# Altium PCB 400926.PcbDoc (part 7 of 7)
Units mm, origin at the board's own origin, x right, y up, seen from the top; angles counter-clockwise.
Board outline 148.5 x 63.5 mm, 4 copper layers (Top Layer, Mid-Layer 1, Mid-Layer 2, Bottom Layer), stack 1.514 mm thick; 311 components, 281 nets, 1495 pads, 2232 vias.
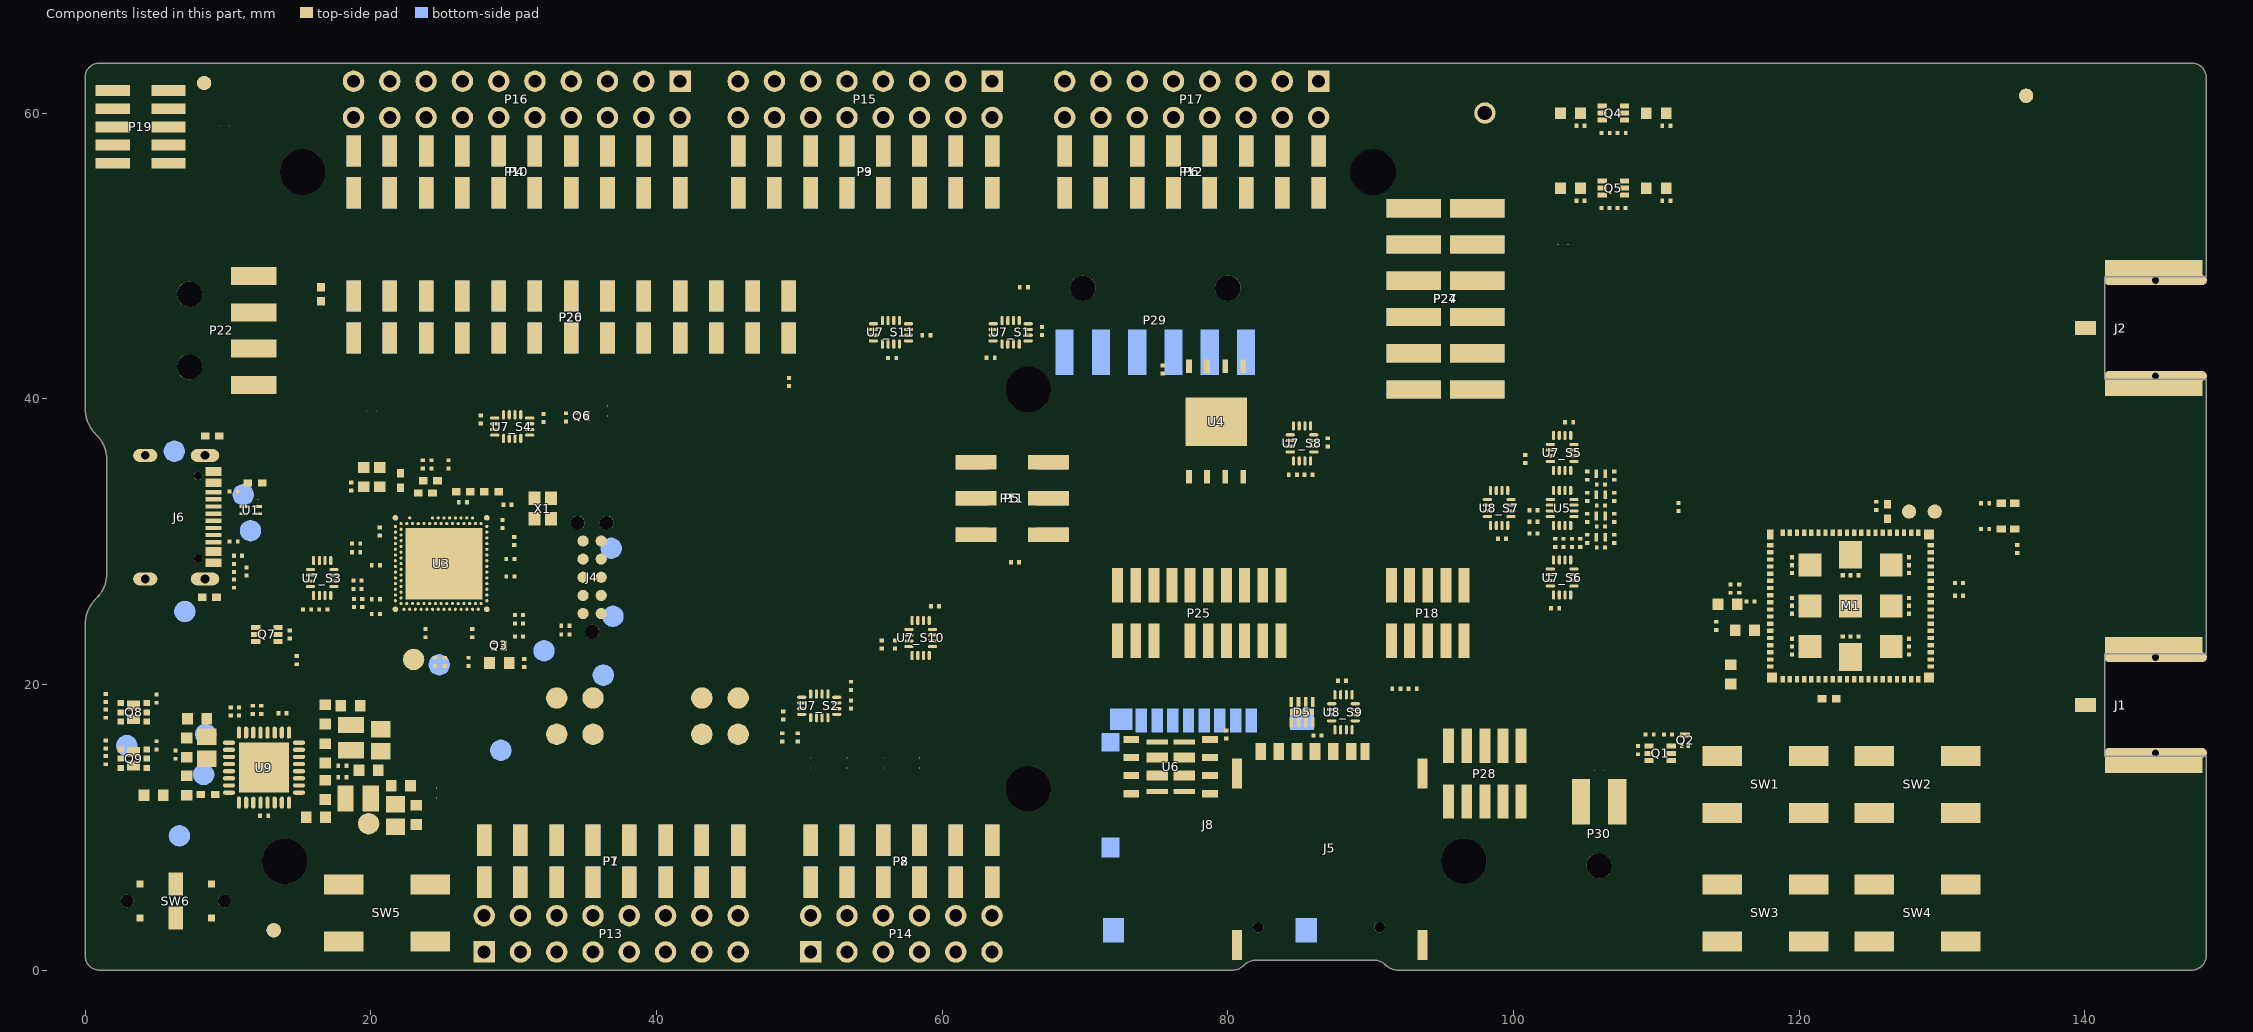
[diagram p8: the components of this part, seen from the top]

## Other copper
Top Layer:
  region net VIN:5V: 39.626,46.224 38.606,46.224 38.606,45.224 39.626,45.224
  region net VDD_nRF: 42.166,46.224 41.146,46.224 41.146,45.224 42.166,45.224
  region net LTE_RF1: 125.7,20.149 125.527,19.976 ccw(c125.954,19.549) 125.35,19.549 126.35,19.549 ccw(c125.746,19.549) 126.173,19.976 126,20.149 126,20.599 125.7,20.599
  region net GPS_RF1: 129.45,21.099 129.623,20.926 ccw(c130.05,21.352) 130.05,20.749 130.05,21.749 ccw(c130.05,21.145) 129.623,21.572 129.45,21.399 129,21.399 129,21.099
  region net VDD_1V8: 14.7,12.574 14.7,11.249 ccw(c16.45,11.249) 16.45,9.499 20.025,9.499 ccw(c20.025,10.074) 20.6,10.074 20.6,12.906 19.432,12.906 19.432,11.031 cw(c19.1,11.031) 19.1,10.699 ccw(c19.1,10.499) 18.9,10.499 18.9,10.299 cw(c18.725,10.299) 18.725,10.124 16.3,10.124 cw(c16.3,10.599) 15.825,10.599 15.825,11.604 15.25,12.084 15.25,12.574
  region net NetC70_2: 21.506,10.571 21.506,10.573 23.622,10.573 ccw(c23.622,11.07) 24.119,11.07 cw(c24.147,11.07) 24.147,11.098 25.011,11.098 cw(c25.011,11.022) 25.087,11.022 25.087,9.686 cw(c24.9,9.686) 24.9,9.499 21.074,9.499 cw(c21.074,9.521) 21.052,9.521 21.052,10.571
  region net VDD_1V8: 19.432,12.906 20.662,12.906 ccw(c20.662,13.296) 21.052,13.296 21.802,13.296 21.802,12.496 ccw(c22.177,12.496) 22.177,12.121 22.402,12.121 22.402,11.071 19.432,11.071
  region net NetC59_2: 16.427,18.958 cw(c16.465,18.958) 16.465,18.996 18.402,18.996 18.402,18.196 ccw(c18.874,18.196) 18.874,17.724 21.05,17.724 cw(c21.05,17.399) 21.375,17.399 21.375,16.349 20.025,16.349 ccw(c19.78,16.349) 19.78,16.594 17.715,16.594 17.715,17.724 ccw(c17.231,17.724) 17.231,18.208 16.427,18.208
  region net VSYS: 7.852,15.821 7.852,16.871 ccw(c7.852,17.171) 8.152,17.171 8.152,19.399 8.902,19.399 8.902,17.171 ccw(c9.202,17.171) 9.202,16.871 9.202,15.821
  region net VSYS: 14.975,14.074 14.975,13.774 15.405,13.774 cw(c15.405,13.264) 15.747,13.642 cw(c11.993,9.491) 16.416,12.921 17.227,12.921 17.227,14.871 16.416,14.871 cw(c13.851,16.714) 15.837,14.258 cw(c15.317,14.901) 15.317,14.074
  region net NetC57_2: 6.725,14.524 6.725,15.274 9.2,15.274 ccw(c10.306,15.577) 9.75,14.574 10.15,14.574 10.15,14.274 6.975,14.274 cw(c6.975,14.524)
  region net VDD_5V: 6.7,13.974 6.7,13.249 ccw(c6.725,13.249) 6.725,13.224 8.165,13.224 ccw(c8.165,13.43) 8.31,13.284 8.697,13.671 cw(c8.946,13.422) 8.946,13.774 10.325,13.774 10.325,14.074 6.8,14.074 ccw(c6.8,13.974)
  region net VIN:5V: 2.27,15.239 2.27,16.144 cw(c2.65,16.144) 2.65,16.524 4.15,16.524 cw(c4.15,16.199) 4.475,16.199 cw(c4.15,16.199) 4.15,15.874 2.935,15.874 ccw(c2.935,15.659) 2.72,15.659 2.72,15.239
  region net VDD_nRF: 111.048,31.744 111.05,31.746 111.05,31.889 cw(c111.256,31.889) 111.11,32.034 111.307,32.231 cw(c111.41,32.128) 111.41,32.274 111.679,32.274 cw(c111.679,32.103) 111.8,32.224 112.007,32.017 cw(c111.906,31.915) 112.049,31.915 112.049,31.741
  region net VDD_5V: 43.446,42.58 44.946,42.58 cw(c44.946,42.255) 45.271,42.255 cw(c44.946,42.255) 44.946,41.93 43.446,41.93 cw(c43.446,42.255) 43.121,42.255 cw(c43.446,42.255)
  region net VDD: 71.375,20.849 70.5,20.849 ccw(c70.5,20.349) 70,20.349 ccw(c70.5,20.349) 70.5,19.849 71.375,19.849
  region net VDD: 71.125,20.849 72,20.849 cw(c72,20.349) 72.5,20.349 cw(c72,20.349) 72,19.849 71.125,19.849
  region net VDD: 22.558,39.484 23.177,38.865 ccw(c23.53,39.219) 23.884,38.865 ccw(c23.53,39.219) 23.884,39.572 23.265,40.191
  region net VDD: 22.735,39.307 22.116,39.926 cw(c22.47,40.279) 22.116,40.633 cw(c22.47,40.279) 22.823,40.633 23.442,40.014
  region net VDD_5V: 16.144,38.659 16.144,36.748 cw(c15.819,36.75) 15.494,36.75 15.494,38.659 cw(c15.819,38.659) 15.819,38.984 cw(c15.819,38.659)
  pour cut-out: 124.477,20.799 125.125,20.799 125.125,20.174 124.477,20.174
  pour cut-out: 127.223,20.799 126.575,20.799 126.575,20.174 127.223,20.174
  pour cut-out: 135.522,29.555 135.608,29.519 135.774,29.409 135.807,29.376 135.84,29.343 135.95,29.177 135.986,29.091 136.025,28.896 136.025,28.872 136.029,28.849 136.029,22.851 136.03,22.849 136.027,22.837 136.029,22.826 135.988,22.414 135.981,22.391 135.979,22.368 135.859,21.972 135.848,21.951 135.841,21.929 135.646,21.564 135.631,21.545 135.62,21.525 135.357,21.205 135.339,21.19 135.324,21.172 135.004,20.909 134.983,20.898 134.965,20.883 134.6,20.688 134.578,20.681 134.557,20.67 134.161,20.55 134.138,20.548 134.115,20.541 133.703,20.5 133.692,20.502 133.68,20.499 133.678,20.5 130.05,20.5 130.027,20.504 130.003,20.504 129.947,20.516 129.938,20.516 129.929,20.519 129.925,20.52 129.915,20.52 129.856,20.531 129.847,20.535 129.842,20.536 129.834,20.537 129.825,20.54 129.808,20.543 129.792,20.55 129.777,20.554 129.766,20.56 129.755,20.562 129.7,20.585 129.69,20.592 129.679,20.595 129.626,20.623 129.617,20.631 129.606,20.635 129.557,20.668 129.549,20.676 129.538,20.682 129.492,20.72 129.485,20.729 129.475,20.735 129.454,20.756 129.351,20.859 129,20.859 128.908,20.878 128.831,20.93 128.779,21.007 128.76,21.099 128.76,21.399 128.779,21.491 128.831,21.568 128.908,21.62 129,21.638 129.351,21.638 129.454,21.742 129.475,21.763 129.485,21.769 129.492,21.778 129.538,21.816 129.549,21.822 129.557,21.83 129.606,21.863 129.617,21.867 129.626,21.875 129.679,21.903 129.69,21.906 129.7,21.913 129.755,21.936 129.766,21.938 129.777,21.944 129.792,21.948 129.808,21.955 129.826,21.958 129.834,21.961 129.842,21.962 129.847,21.963 129.856,21.967 129.915,21.978 129.925,21.978 129.93,21.979 129.938,21.982 129.946,21.982 130.003,21.994 130.027,21.994 130.05,21.998 133.68,21.998 133.693,21.996 133.901,22.023 134.108,22.108 134.285,22.244 134.421,22.421 134.506,22.628 134.533,22.836 134.531,22.849 134.531,28.849 134.535,28.872 134.535,28.896 134.574,29.091 134.61,29.177 134.72,29.343 134.753,29.376 134.786,29.409 134.952,29.519 135.038,29.555 135.233,29.594 135.327,29.594
  pour cut-out: 140.123,45.694 140.147,45.694 140.208,45.681 140.8,45.681 140.892,45.663 140.969,45.611 141.021,45.534 141.04,45.442 141.04,44.442 141.021,44.35 140.969,44.273 140.892,44.221 140.8,44.202 140.114,44.202 140.1,44.2 137.82,44.2 137.801,44.204 137.47,44.171 137.133,44.069 136.822,43.903 136.55,43.679 136.326,43.407 136.16,43.096 136.058,42.759 136.025,42.428 136.026,42.428 136.029,42.409 136.029,30.879 136.029,30.089 136.025,30.066 136.025,30.042 135.986,29.847 135.95,29.761 135.84,29.595 135.807,29.562 135.774,29.529 135.608,29.419 135.522,29.383 135.327,29.344 135.233,29.344 135.038,29.383 134.952,29.419 134.786,29.529 134.753,29.562 134.72,29.595 134.61,29.761 134.574,29.847 134.535,30.042 134.535,30.066 134.531,30.089 134.531,30.879 134.531,42.409 134.533,42.42 134.532,42.428 134.569,42.905 134.574,42.923 134.575,42.942 134.687,43.407 134.695,43.424 134.699,43.443 134.882,43.885 134.892,43.901 134.899,43.919 135.149,44.327 135.162,44.34 135.171,44.357 135.482,44.721 135.496,44.733 135.508,44.747 135.872,45.058 135.889,45.067 135.902,45.08 136.31,45.33 136.328,45.337 136.344,45.347 136.786,45.53 136.805,45.534 136.822,45.542 137.287,45.654 137.306,45.654 137.324,45.66 137.801,45.697 137.809,45.696 137.82,45.698 140.1,45.698
  pour cut-out: 126.092,20.82 126.169,20.768 126.221,20.691 126.24,20.599 126.24,20.248 126.343,20.145 126.364,20.124 126.37,20.114 126.379,20.107 126.417,20.061 126.423,20.05 126.431,20.042 126.464,19.993 126.468,19.982 126.476,19.973 126.504,19.92 126.507,19.909 126.514,19.899 126.537,19.844 126.538,19.837 126.544,19.824 126.545,19.822 126.545,19.82 126.556,19.794 126.561,19.767 126.562,19.765 126.562,19.764 126.565,19.749 126.568,19.743 126.579,19.684 126.579,19.678 126.582,19.663 126.583,19.661 126.583,19.66 126.595,19.599 126.595,19.58 126.608,19.513 126.636,19.471 126.756,19.379 126.906,19.317 127.058,19.297 127.066,19.298 140.1,19.298 140.123,19.294 140.147,19.294 140.208,19.281 140.8,19.281 140.892,19.263 140.969,19.211 141.021,19.134 141.04,19.042 141.04,18.042 141.021,17.95 140.969,17.873 140.892,17.821 140.8,17.802 140.114,17.802 140.1,17.8 127.066,17.8 127.051,17.802 127.042,17.802 126.676,17.838 126.654,17.844 126.63,17.847 126.279,17.953 126.258,17.965 126.235,17.971 125.911,18.145 125.893,18.16 125.872,18.171 125.588,18.404 125.586,18.406 125.569,18.418 125.56,18.431 125.548,18.441 125.331,18.724 125.317,18.752 125.3,18.778 125.164,19.107 125.157,19.138 125.147,19.168 125.101,19.521 125.102,19.537 125.099,19.552 125.105,19.583 125.105,19.589 125.105,19.599 125.106,19.604 125.107,19.614 125.109,19.619 125.117,19.659 125.117,19.661 125.118,19.663 125.121,19.678 125.121,19.684 125.132,19.743 125.135,19.749 125.138,19.764 125.138,19.765 125.139,19.767 125.144,19.794 125.155,19.82 125.155,19.822 125.156,19.824 125.162,19.837 125.163,19.844 125.186,19.899 125.193,19.909 125.196,19.92 125.224,19.973 125.232,19.982 125.236,19.993 125.269,20.042 125.277,20.05 125.283,20.061 125.321,20.107 125.33,20.114 125.336,20.124 125.357,20.145 125.46,20.248 125.46,20.599 125.479,20.691 125.531,20.768 125.608,20.82 125.7,20.839 126,20.839
  pour cut-out: 139.85,19.298 141.2,19.298 141.2,17.8 139.85,17.8
  pour cut-out: 134.531,28.849 134.531,30.089 136.029,30.089 136.029,28.849
  pour cut-out: 139.85,45.698 141.2,45.698 141.2,44.2 139.85,44.2
  pour cut-out: 17.859,10.299 17.859,10.999 17.232,10.999 17.232,10.299
  pour cut-out: 19.552,13.193 19.552,13.346 18.162,13.346 18.162,13.193
  pour cut-out: 19.552,14.446 19.552,14.599 18.162,14.599 18.162,14.446
  pour cut-out: 19.814,13.346 19.814,14.446 19.552,14.446 19.552,13.346
  pour cut-out: 18.162,13.346 18.162,14.446 17.9,14.446 17.9,13.346
  pour cut-out: 16.175,16.274 15.425,15.524 15.59,15.359 16.34,16.109
  pour cut-out: 16.241,15.498 15.491,14.748 15.592,14.647 16.342,15.397
  region net GND: 18.162,14.446 19.552,14.446 19.552,13.346 18.161,13.346
  region net GND: 14.9,14.799 15.54,14.799 16.24,15.499 17.227,15.499 17.227,17.315 16.423,17.315 16.423,16.221 15.305,15.066 14.9,15.066
  region net VDD_3V0: 20.152,13.596 20.152,14.396 20.023,14.821 20.023,15.849 21.379,15.849 21.379,13.596
  region net VDD_5V: 4.55,11.149 4.55,14.349 4.05,14.349 4.05,13.749 3.65,13.749 3.65,11.149
  pour cut-out: 16.405,11.793 15.425,12.774 15.324,12.673 16.305,11.693
  pour cut-out: 16.348,12.425 15.599,13.175 15.498,13.074 16.248,12.324
  pour cut-out: 19.432,10.999 19.432,13.028 18.792,13.028 18.792,10.999
  pour cut-out: 16.2,17.608 16.2,15.421 16.427,15.421 16.427,17.608
  region net GND: 17.227,10.299 16.425,10.299 16.425,11.774 15.425,12.774 15.1,12.774 15.1,13.074 15.498,13.074 16.248,12.324 17.227,12.324
  pour cut-out: 30.6,21.999 30.1,21.999 30.1,20.999 30.6,20.999
  pour cut-out: 29.2,21.999 28.7,21.999 28.7,20.999 29.2,20.999
  region net 5V: 38.61,3.81 38.61,10.199 37.59,10.199 37.59,3.81
  region net FB2:VBUS: 10.3,26.899 11,26.899 11,27.699 11.6,27.699 11.6,26.699 11.2,26.299 10.3,26.299
  region net VDD_5V: 44.706,47.074 44.706,42.955 45.222,42.439 43.17,42.439 43.686,42.955 43.686,47.074
  pour cut-out: 30.792,34.198 30.792,30.465 33.104,30.465 33.104,34.198
Mid-Layer 1:
  pour cut-out: 133.28,31.204 134.395,31.204 cw(c134.395,31.044) 134.555,31.044 134.555,30.729 cw(c134.38,30.729) 134.38,30.554 133.295,30.554 cw(c133.295,30.746) 133.102,30.746 133.102,31.026 cw(c133.28,31.026)
  pour cut-out: 13.225,22.349 13.775,22.349 cw(c13.775,21.999) 14.125,21.999 14.125,21.424 cw(c13.775,21.424) 13.775,21.074 13.225,21.074 cw(c13.225,21.424) 12.875,21.424 12.875,21.999 cw(c13.225,21.999)
  pour cut-out: 3.825,11.549 4.375,11.549 cw(c4.375,11.199) 4.725,11.199 4.725,10.624 cw(c4.375,10.624) 4.375,10.274 3.825,10.274 cw(c3.825,10.624) 3.475,10.624 3.475,11.199 cw(c3.825,11.199)
  pour cut-out: 84.625,29.524 84.625,28.974 cw(c84.275,28.974) 84.275,28.624 83.7,28.624 cw(c83.7,28.974) 83.35,28.974 83.35,29.524 cw(c83.7,29.524) 83.7,29.874 84.275,29.874 cw(c84.275,29.524)
  pour cut-out: 72.125,15.524 72.125,14.974 cw(c71.775,14.974) 71.775,14.624 71.2,14.624 cw(c71.2,14.974) 70.85,14.974 70.85,15.524 cw(c71.2,15.524) 71.2,15.874 71.775,15.874 cw(c71.775,15.524)
  pour cut-out: 72.125,13.524 72.125,12.974 cw(c71.775,12.974) 71.775,12.624 71.2,12.624 cw(c71.2,12.974) 70.85,12.974 70.85,13.524 cw(c71.2,13.524) 71.2,13.874 71.775,13.874 cw(c71.775,13.524)
  pour cut-out: 106.625,14.249 106.625,13.699 cw(c106.275,13.699) 106.275,13.349 105.7,13.349 cw(c105.7,13.699) 105.35,13.699 105.35,14.249 cw(c105.7,14.249) 105.7,14.599 106.275,14.599 cw(c106.275,14.249)
  pour cut-out: 56.275,29.855 55.725,29.855 cw(c55.725,30.205) 55.375,30.205 55.375,30.78 cw(c55.725,30.78) 55.725,31.13 56.275,31.13 cw(c56.275,30.78) 56.625,30.78 56.625,30.205 cw(c56.275,30.205)
  pour cut-out: 56.625,32.255 56.625,31.705 cw(c56.275,31.705) 56.275,31.355 55.7,31.355 cw(c55.7,31.705) 55.35,31.705 55.35,32.255 cw(c55.7,32.255) 55.7,32.605 56.275,32.605 cw(c56.275,32.255)
  pour cut-out: 56.625,29.255 56.625,28.705 cw(c56.275,28.705) 56.275,28.355 55.7,28.355 cw(c55.7,28.705) 55.35,28.705 55.35,29.255 cw(c55.7,29.255) 55.7,29.605 56.275,29.605 cw(c56.275,29.255)
  pour cut-out: 67.625,26.524 67.625,25.974 cw(c67.275,25.974) 67.275,25.624 66.7,25.624 cw(c66.7,25.974) 66.35,25.974 66.35,26.524 cw(c66.7,26.524) 66.7,26.874 67.275,26.874 cw(c67.275,26.524)
  pour cut-out: 67.625,28.024 67.625,27.474 cw(c67.275,27.474) 67.275,27.124 66.7,27.124 cw(c66.7,27.474) 66.35,27.474 66.35,28.024 cw(c66.7,28.024) 66.7,28.374 67.275,28.374 cw(c67.275,28.024)
  pour cut-out: 58.775,25.624 58.225,25.624 cw(c58.225,25.974) 57.875,25.974 57.875,26.549 cw(c58.225,26.549) 58.225,26.899 58.775,26.899 cw(c58.775,26.549) 59.125,26.549 59.125,25.974 cw(c58.775,25.974)
  pour cut-out: 57.275,25.624 56.725,25.624 cw(c56.725,25.974) 56.375,25.974 56.375,26.549 cw(c56.725,26.549) 56.725,26.899 57.275,26.899 cw(c57.275,26.549) 57.625,26.549 57.625,25.974 cw(c57.275,25.974)
  pour cut-out: 56.275,23.624 55.725,23.624 cw(c55.725,23.974) 55.375,23.974 55.375,24.549 cw(c55.725,24.549) 55.725,24.899 56.275,24.899 cw(c56.275,24.549) 56.625,24.549 56.625,23.974 cw(c56.275,23.974)
  pour cut-out: 58.725,20.874 59.275,20.874 cw(c59.275,20.524) 59.625,20.524 59.625,19.949 cw(c59.275,19.949) 59.275,19.599 58.725,19.599 cw(c58.725,19.949) 58.375,19.949 58.375,20.524 cw(c58.725,20.524)
  pour cut-out: 57.775,19.624 57.225,19.624 cw(c57.225,19.974) 56.875,19.974 56.875,20.549 cw(c57.225,20.549) 57.225,20.899 57.775,20.899 cw(c57.775,20.549) 58.125,20.549 58.125,19.974 cw(c57.775,19.974)
  pour cut-out: 58.145,15.124 58.695,15.124 cw(c58.695,14.774) 59.045,14.774 59.045,14.199 cw(c58.695,14.199) 58.695,13.849 58.145,13.849 cw(c58.145,14.199) 57.795,14.199 57.795,14.774 cw(c58.145,14.774)
  pour cut-out: 56.155,13.874 55.605,13.874 cw(c55.605,14.224) 55.255,14.224 55.255,14.799 cw(c55.605,14.799) 55.605,15.149 56.155,15.149 cw(c56.155,14.799) 56.505,14.799 56.505,14.224 cw(c56.155,14.224)
  pour cut-out: 53.065,15.124 53.615,15.124 cw(c53.615,14.774) 53.965,14.774 53.965,14.199 cw(c53.615,14.199) 53.615,13.849 53.065,13.849 cw(c53.065,14.199) 52.715,14.199 52.715,14.774 cw(c53.065,14.774)
  pour cut-out: 51.075,13.874 50.525,13.874 cw(c50.525,14.224) 50.175,14.224 50.175,14.799 cw(c50.525,14.799) 50.525,15.149 51.075,15.149 cw(c51.075,14.799) 51.425,14.799 51.425,14.224 cw(c51.075,14.224)
  pour cut-out: 24.325,11.824 24.875,11.824 cw(c24.875,11.474) 25.225,11.474 25.225,10.899 cw(c24.875,10.899) 24.875,10.549 24.325,10.549 cw(c24.325,10.899) 23.975,10.899 23.975,11.474 cw(c24.325,11.474)
  pour cut-out: 23.937,12.174 23.937,12.724 cw(c24.287,12.724) 24.287,13.074 24.862,13.074 cw(c24.862,12.724) 25.212,12.724 25.212,12.174 cw(c24.863,12.174) 24.862,11.824 24.287,11.824 cw(c24.287,12.174)
  pour cut-out: 26.8,11.474 26.8,10.924 cw(c26.45,10.924) 26.45,10.574 25.875,10.574 cw(c25.875,10.924) 25.525,10.924 25.525,11.474 cw(c25.875,11.474) 25.875,11.824 26.45,11.824 cw(c26.45,11.474)
  pour cut-out: 9.125,56.974 9.125,57.524 cw(c9.475,57.524) 9.475,57.874 10.05,57.874 cw(c10.05,57.524) 10.4,57.524 10.4,56.974 cw(c10.05,56.974) 10.05,56.624 9.475,56.624 cw(c9.475,56.974)
  pour cut-out: 9.125,58.819 9.125,59.369 cw(c9.475,59.369) 9.475,59.719 10.05,59.719 cw(c10.05,59.369) 10.4,59.369 10.4,58.819 cw(c10.05,58.819) 10.05,58.469 9.475,58.469 cw(c9.475,58.819)
  pour cut-out: 15.515,46.693 14.965,46.693 cw(c14.965,47.043) 14.615,47.043 14.615,47.618 cw(c14.965,47.618) 14.965,47.968 15.515,47.968 cw(c15.515,47.618) 15.865,47.618 15.865,47.043 cw(c15.515,47.043)
  pour cut-out: 19.791,39.772 20.341,39.772 cw(c20.341,39.422) 20.691,39.422 20.691,38.847 cw(c20.341,38.847) 20.341,38.497 19.791,38.497 cw(c19.791,38.847) 19.441,38.847 19.441,39.422 cw(c19.791,39.422)
  pour cut-out: 36.3,39.786 36.85,39.786 cw(c36.85,39.436) 37.2,39.436 37.2,38.861 cw(c36.85,38.861) 36.85,38.511 36.3,38.511 cw(c36.3,38.861) 35.95,38.861 35.95,39.436 cw(c36.3,39.436)
  pour cut-out: 73.935,41.579 73.385,41.579 cw(c73.385,41.929) 73.035,41.929 73.035,42.504 cw(c73.385,42.504) 73.385,42.854 73.935,42.854 cw(c73.935,42.504) 74.285,42.504 74.285,41.929 cw(c73.935,41.929)
  pour cut-out: 73.385,49.624 73.935,49.624 cw(c73.935,49.274) 74.285,49.274 74.285,48.699 cw(c73.935,48.699) 73.935,48.349 73.385,48.349 cw(c73.385,48.699) 73.035,48.699 73.035,49.274 cw(c73.385,49.274)
  pour cut-out: 70.845,49.624 71.395,49.624 cw(c71.395,49.274) 71.745,49.274 71.745,48.699 cw(c71.395,48.699) 71.395,48.349 70.845,48.349 cw(c70.845,48.699) 70.495,48.699 70.495,49.274 cw(c70.845,49.274)
  pour cut-out: 68.305,49.624 68.855,49.624 cw(c68.855,49.274) 69.205,49.274 69.205,48.699 cw(c68.855,48.699) 68.855,48.349 68.305,48.349 cw(c68.305,48.699) 67.955,48.699 67.955,49.274 cw(c68.305,49.274)
  pour cut-out: 104.097,51.075 104.097,50.525 cw(c103.747,50.525) 103.747,50.175 103.172,50.175 cw(c103.172,50.525) 102.822,50.525 102.822,51.075 cw(c103.172,51.075) 103.172,51.425 103.747,51.425 cw(c103.748,51.075)
  pour cut-out: 135.505,29.406 135.505,28.981 135.055,28.981 135.055,29.406
  pour cut-out: 135.505,29.976 135.505,29.551 135.055,29.551 135.055,29.976
  pour cut-out: 133.102,33.004 134.555,33.004 134.555,32.354 133.102,32.354
  pour cut-out: 134.705,31.204 135.505,31.204 135.505,30.554 134.705,30.554
  pour cut-out: 134.705,33.004 135.505,33.004 135.505,32.354 134.705,32.354
  pour cut-out: 139.85,19.298 141.2,19.298 141.2,17.8 139.85,17.8
  pour cut-out: 135.522,29.555 135.608,29.519 135.774,29.409 135.807,29.376 135.84,29.343 135.95,29.177 135.986,29.091 136.025,28.896 136.025,28.872 136.029,28.849 136.029,22.851 136.03,22.849 136.027,22.837 136.029,22.826 135.988,22.414 135.981,22.391 135.979,22.368 135.859,21.972 135.848,21.951 135.841,21.929 135.646,21.564 135.631,21.545 135.62,21.525 135.357,21.205 135.339,21.19 135.324,21.172 135.004,20.909 134.983,20.898 134.965,20.883 134.6,20.688 134.578,20.681 134.557,20.67 134.161,20.55 134.138,20.548 134.115,20.541 133.703,20.5 133.692,20.502 133.68,20.499 133.678,20.5 130.05,20.5 130.027,20.504 130.003,20.504 129.947,20.516 129.938,20.516 129.929,20.519 129.925,20.52 129.915,20.52 129.856,20.531 129.847,20.535 129.842,20.536 129.834,20.537 129.825,20.54 129.808,20.543 129.792,20.55 129.777,20.554 129.766,20.56 129.755,20.562 129.7,20.585 129.69,20.592 129.679,20.595 129.626,20.623 129.617,20.631 129.606,20.635 129.557,20.668 129.549,20.676 129.538,20.682 129.492,20.72 129.485,20.729 129.475,20.735 129.454,20.756 129.351,20.859 129,20.859 128.908,20.878 128.831,20.93 128.779,21.007 128.76,21.099 128.76,21.399 128.779,21.491 128.831,21.568 128.908,21.62 129,21.638 129.351,21.638 129.454,21.742 129.475,21.763 129.485,21.769 129.492,21.778 129.538,21.816 129.549,21.822 129.557,21.83 129.606,21.863 129.617,21.867 129.626,21.875 129.679,21.903 129.69,21.906 129.7,21.913 129.755,21.936 129.766,21.938 129.777,21.944 129.792,21.948 129.808,21.955 129.826,21.958 129.834,21.961 129.842,21.962 129.847,21.963 129.856,21.967 129.915,21.978 129.925,21.978 129.93,21.979 129.938,21.982 129.946,21.982 130.003,21.994 130.027,21.994 130.05,21.998 133.68,21.998 133.693,21.996 133.901,22.023 134.108,22.108 134.285,22.244 134.421,22.421 134.506,22.628 134.533,22.836 134.531,22.849 134.531,28.849 134.535,28.872 134.535,28.896 134.574,29.091 134.61,29.177 134.72,29.343 134.753,29.376 134.786,29.409 134.952,29.519 135.038,29.555 135.233,29.594 135.327,29.594
  pour cut-out: 134.531,28.849 134.531,30.089 136.029,30.089 136.029,28.849
  pour cut-out: 139.85,45.698 141.2,45.698 141.2,44.2 139.85,44.2
  pour cut-out: 126.092,20.82 126.169,20.768 126.221,20.691 126.24,20.599 126.24,20.248 126.343,20.145 126.364,20.124 126.37,20.114 126.379,20.107 126.417,20.061 126.423,20.05 126.431,20.042 126.464,19.993 126.468,19.982 126.476,19.973 126.504,19.92 126.507,19.909 126.514,19.899 126.537,19.844 126.538,19.837 126.544,19.824 126.545,19.822 126.545,19.82 126.556,19.794 126.561,19.767 126.562,19.765 126.562,19.764 126.565,19.749 126.568,19.743 126.579,19.684 126.579,19.678 126.582,19.663 126.583,19.661 126.583,19.66 126.595,19.599 126.595,19.58 126.608,19.513 126.636,19.471 126.756,19.379 126.906,19.317 127.058,19.297 127.066,19.298 139.85,19.298 139.873,19.294 139.897,19.294 139.923,19.288 140.6,19.288 140.692,19.27 140.769,19.218 140.821,19.141 140.84,19.049 140.84,18.049 140.821,17.957 140.769,17.88 140.692,17.828 140.6,17.809 139.923,17.809 139.897,17.804 139.873,17.804 139.85,17.8 127.066,17.8 127.051,17.802 127.042,17.802 126.676,17.838 126.654,17.844 126.63,17.847 126.279,17.953 126.258,17.965 126.235,17.971 125.911,18.145 125.893,18.16 125.872,18.171 125.588,18.404 125.586,18.406 125.569,18.418 125.56,18.431 125.548,18.441 125.331,18.724 125.317,18.752 125.3,18.778 125.164,19.107 125.157,19.138 125.147,19.168 125.101,19.521 125.102,19.537 125.099,19.552 125.105,19.583 125.105,19.589 125.105,19.599 125.106,19.604 125.107,19.614 125.109,19.619 125.117,19.659 125.117,19.661 125.118,19.663 125.121,19.678 125.121,19.684 125.132,19.743 125.135,19.749 125.138,19.764 125.138,19.765 125.139,19.767 125.144,19.794 125.155,19.82 125.155,19.822 125.156,19.824 125.162,19.837 125.163,19.844 125.186,19.899 125.193,19.909 125.196,19.92 125.224,19.973 125.232,19.982 125.236,19.993 125.269,20.042 125.277,20.05 125.283,20.061 125.321,20.107 125.33,20.114 125.336,20.124 125.357,20.145 125.46,20.248 125.46,20.599 125.479,20.691 125.531,20.768 125.608,20.82 125.7,20.839 126,20.839
  pour cut-out: 139.873,45.694 139.897,45.694 140.092,45.655 140.178,45.619 140.344,45.509 140.377,45.476 140.41,45.443 140.52,45.277 140.556,45.191 140.595,44.996 140.595,44.902 140.556,44.707 140.52,44.621 140.41,44.455 140.377,44.422 140.344,44.389 140.178,44.279 140.092,44.243 139.897,44.204 139.873,44.204 139.85,44.2 137.82,44.2 137.801,44.204 137.47,44.171 137.133,44.069 136.822,43.903 136.55,43.679 136.326,43.407 136.16,43.096 136.058,42.759 136.025,42.428 136.026,42.428 136.029,42.409 136.029,30.089 136.025,30.066 136.025,30.042 135.986,29.847 135.95,29.761 135.84,29.595 135.807,29.562 135.774,29.529 135.608,29.419 135.522,29.383 135.327,29.344 135.233,29.344 135.038,29.383 134.952,29.419 134.786,29.529 134.753,29.562 134.72,29.595 134.61,29.761 134.574,29.847 134.535,30.042 134.535,30.066 134.531,30.089 134.531,42.409 134.533,42.42 134.532,42.428 134.569,42.905 134.574,42.923 134.575,42.942 134.687,43.407 134.695,43.424 134.699,43.443 134.882,43.885 134.892,43.901 134.899,43.919 135.149,44.327 135.162,44.34 135.171,44.357 135.482,44.721 135.496,44.733 135.508,44.747 135.872,45.058 135.889,45.067 135.902,45.08 136.31,45.33 136.328,45.337 136.344,45.347 136.786,45.53 136.805,45.534 136.822,45.542 137.287,45.654 137.306,45.654 137.324,45.66 137.801,45.697 137.809,45.696 137.82,45.698 139.85,45.698
Mid-Layer 2:
  region net VDD_nRF: 111,32.199 112.1,32.199 cw(c112.1,31.999) 112.3,31.999 112.3,31.399 110.8,31.399 110.8,31.999 cw(c111,31.999)
  region net VDD_5V: 15.494,36.749 15.494,38.249 cw(c15.819,38.249) 15.819,38.574 cw(c15.819,38.249) 16.144,38.249 16.144,36.749 cw(c15.819,36.749) 15.819,36.424 cw(c15.819,36.749)
  region net VIN:5V: 38.791,44.22 38.791,45.72 cw(c39.116,45.72) 39.116,46.045 cw(c39.116,45.72) 39.441,45.72 39.441,44.22 cw(c39.116,44.22) 39.116,43.895 cw(c39.116,44.22)
  region net VDD_5V: 43.446,42.58 44.946,42.58 cw(c44.946,42.255) 45.271,42.255 cw(c44.946,42.255) 44.946,41.93 43.446,41.93 cw(c43.446,42.255) 43.121,42.255 cw(c43.446,42.255)
  region net VDD: 23.301,38.989 22.24,40.05 cw(c22.47,40.279) 22.24,40.509 cw(c22.47,40.279) 22.699,40.509 23.76,39.448 cw(c23.53,39.219) 23.76,38.989 cw(c23.53,39.219)
  region net VDD: 71.375,20.849 70.5,20.849 ccw(c70.5,20.349) 70,20.349 ccw(c70.5,20.349) 70.5,19.849 71.375,19.849
  region net VDD: 71.125,20.849 72,20.849 cw(c72,20.349) 72.5,20.349 cw(c72,20.349) 72,19.849 71.125,19.849
  region net 5V: 66.972,35.235 68.472,35.235 ccw(c68.472,35.56) 68.797,35.56 ccw(c68.472,35.56) 68.472,35.885 66.972,35.885 ccw(c66.972,35.56) 66.647,35.56 ccw(c66.972,35.56)
  region net VIN:5V: 14.719,36.749 14.719,38.249 cw(c15.044,38.249) 15.044,38.574 cw(c15.044,38.249) 15.369,38.249 15.369,36.749 cw(c15.044,36.749) 15.044,36.424 cw(c15.044,36.749)
  region net VDD: 22.411,38.438 22.723,38.751 cw(c23.068,38.405) 23.068,38.894 23.595,38.894 22.145,40.344 22.145,39.792 cw(c21.717,39.792) 22.019,39.49 21.689,39.16
Bottom Layer:
  rectangle net VIN:5V: 38.606,45.224 39.626,46.224
  rectangle net VDD_nRF: 41.146,45.224 42.166,46.224
  region net VDD_nRF: 112.1,31.299 111,31.299 cw(c111,31.499) 110.8,31.499 110.8,32.799 111.782,32.799 112.3,32.281 112.3,31.499 cw(c112.1,31.499)
  region net 5V: 55.425,20.499 55.425,21.999 cw(c55.75,21.999) 55.75,22.324 cw(c55.75,21.999) 56.075,21.999 56.075,20.499 cw(c55.75,20.499) 55.75,20.174 cw(c55.75,20.499)
  region net VDD_5V: 43.446,42.58 44.946,42.58 cw(c44.946,42.255) 45.271,42.255 cw(c44.946,42.255) 44.946,41.93 43.446,41.93 cw(c43.446,42.255) 43.121,42.255 cw(c43.446,42.255)
  region net VDD: 22.735,39.307 22.116,39.926 cw(c22.47,40.279) 22.116,40.633 cw(c22.47,40.279) 22.823,40.633 23.442,40.014
  region net VDD: 22.558,39.484 23.177,38.865 ccw(c23.53,39.219) 23.884,38.865 ccw(c23.53,39.219) 23.884,39.572 23.265,40.191
  region net VIN:5V: 14.719,36.749 14.719,38.249 cw(c15.044,38.249) 15.044,38.574 cw(c15.044,38.249) 15.369,38.249 15.369,36.749 cw(c15.044,36.749) 15.044,36.424 cw(c15.044,36.749)
  region net VDD_5V: 16.144,38.249 16.144,36.749 cw(c15.819,36.749) 15.819,36.424 cw(c15.819,36.749) 15.494,36.749 15.494,38.249 cw(c15.819,38.249) 15.819,38.574 cw(c15.819,38.249)
  region net VSYS: 16.947,13.637 16.947,17.249 9.011,17.249 9.011,19.088 ccw(c8.647,19.088) 8.647,19.452 8.528,19.452 ccw(c8.528,19.124) 8.2,19.124 8.2,15.924 15.5,15.924 15.5,13.637
  region net 5V: 37.59,3.81 37.59,9.299 38.61,9.299 38.61,3.81
  region net VDD_5V: 43.686,47.074 43.686,42.955 43.17,42.439 45.222,42.439 44.706,42.955 44.706,47.074

## Silkscreen, mask and mechanical layers (free items; w line width, h text height)
Top Overlay:
  circle w0.254: c88.113,54.366 r0.127
  circle w0.254: c65.278,54.356 r0.127
  circle w0.254: c43.434,54.356 r0.127
  circle w0.254: c26.162,9.144 r0.127
  circle w0.254: c49.022,9.144 r0.127
  region: 78.374,9.073 78.374,8.329 73.156,8.361 74.122,9.328 78.119,9.328
  region: 78.296,3.107 78.296,2.247 78.119,2.07 73.281,2.07 73.104,2.247 73.174,2.317 73.174,3.129 78.274,3.129
  lines w0.1: 9.3,19.499 5.9,19.499 5.9,9.699 18.1,9.699 ; 11.4,19.499 21.7,19.499 21.7,14.299 ; 23.9,9.699 23.9,14.299 21.7,14.299 ; 21.7,14.299 21.7,14.299 ; 18.1,32.799 19.7,32.799 19.7,22.799 27.9,22.799 27.9,24.599 29.7,24.599 29.7,26.999 30.7,26.999 30.7,30.399 33.3,30.399 33.3,34.799 22.7,34.799 22.7,35.899 18.1,35.899 18.1,32.799
  lines w0.15: 37.084,17.779 41.656,17.779 ; 39.37,15.493 39.37,20.065 ; 37.084,15.493 37.084,20.065 41.656,20.065 41.656,15.493 37.084,15.493
  lines w0.25: 73.104,8.236 73.104,2.247 ccw(c73.281,2.247) 73.281,2.07 78.119,2.07 ccw(c78.119,2.247) 78.296,2.247 78.296,9.151 ccw(c78.119,9.151) 78.119,9.328 74.195,9.328 ; 73.155,8.361 74.07,9.276
  lines w0.254: 12.38,60.96 92.837,60.96 ; 14.224,62.23 17.018,62.23 ; 16.764,62.23 16.256,62.484 16.256,61.976 17.018,62.23 ; 26.67,2.54 67.996,2.54 ; 65.481,1.231 65.989,0.977 65.989,1.485 65.227,1.231 ; 68.021,1.231 65.227,1.231 ; 88.341,62.191 88.849,61.937 88.849,62.445 88.087,62.191 ; 90.881,62.191 88.087,62.191 ; 17.018,62.23 16.256,61.722 16.256,62.738 17.018,62.23 ; 65.227,1.231 65.989,0.723 65.989,1.739 65.227,1.231 ; 88.087,62.191 88.849,62.699 88.849,61.683 88.087,62.191
  text "'.PCBnumber'" at 138.674,61.711 h2.03
  text "GND" at 10.662,61.694 h1.78
  text "GND" at 91.198,61.655 h1.78
  text "'.PCBrevision'" at 138.803,60.501 h1.52
  text "For evaluation only; / not FCC approved for resale." at 114.7,58.905 h1.52
  text "GND" at 96.383,57.563 h1.78
  text "DEBUG OUT" at 0.418,53.687 h1.8
  text "COEX1" at 99.601,52.948 h1.3
  text "COEX0" at 87.337,52.918 h1.3
  text "COEX2" at 87.421,50.483 h1.3
  text "P0.11" at 34.537,50.464 h1.7 r90
  text "P0.29" at 99.601,50.417 h1.3
  text "nRF CURRENT / MEASUREMENT" at 0.418,50.295 h1.8
  text "P0.21" at 86.861,50.188 h1.7 r90
  text "P0.31" at 19.297,50.167 h1.7 r90
  text "GND" at 26.928,50.11 h1.7 r90
  text "P0.12" at 31.997,50.095 h1.7 r90
  text "P0.01" at 61.461,50.075 h1.7 r90
  text "P0.13" at 29.457,50.065 h1.7 r90
  text "GPS" at 143.05,49.999 h1.8
  text "P0.10" at 37.077,49.985 h1.7 r90
  text "P0.27" at 71.621,49.855 h1.7 r90
  text "P0.22" at 84.321,49.819 h1.7 r90
  text "P0.25" at 76.701,49.773 h1.7 r90
  text "P0.23" at 81.781,49.789 h1.7 r90
  text "P0.28" at 69.081,49.755 h1.7 r90
  text "P0.26" at 74.161,49.746 h1.7 r90
  text "P0.07" at 46.221,49.742 h1.7 r90
  text "P0.24" at 79.241,49.74 h1.7 r90
  text "P0.20" at 24.377,49.709 h1.7 r90
  text "P0.02" at 58.921,49.706 h1.7 r90
  text "P0.30" at 21.837,49.688 h1.7 r90
  text "P0.03" at 56.381,49.676 h1.7 r90
  text "P0.09" at 39.617,49.652 h1.7 r90
  text "P0.08" at 42.157,49.642 h1.7 r90
  text "P0.05" at 51.301,49.66 h1.7 r90
  text "P0.06" at 48.761,49.633 h1.7 r90
  text "P0.04" at 53.841,49.627 h1.7 r90
  text "P0.00" at 64.001,49.596 h1.7 r90
  text "VDD_nRF" at 0.6,49.228 h1.4
  text "SDATA" at 87.421,47.943 h1.3
  text "SCLK" at 99.601,47.868 h1.3
  text "VDD_5V" at 0.6,46.688 h1.4
  text "VIO" at 89.07,45.412 h1.27
  text "GND" at 99.601,45.328 h1.3
  text "NC" at 0.6,44.148 h1.4
  text "MAGPIO0" at 85.869,42.863 h1.3
  text "MAGPIO1" at 99.601,42.788 h1.3
  text "ID" at 49.667,41.988 h1.3 r90
  text "GND" at 0.6,41.608 h1.4
  text "SEL" at 36.968,41.193 h1.3 r90
  text "VIO / REF" at 47.721,40.959 h1.3 r90
  text "VTG" at 24.268,40.742 h1.3 r90
  text "VDD" at 21.727,40.668 h1.3 r90
  text "VDD / nRF" at 42.625,40.58 h1.3 r90
  text "VDD / 5V" at 45.165,40.58 h1.3 r90
  text "VIN / 5V" at 40.094,40.489 h1.3 r90
  text "VDD / GPIO" at 19.765,40.382 h1.3 r90
  text "SWD / IO" at 27.416,40.34 h1.3 r90
  text "SWD / CLK" at 29.956,40.34 h1.3 r90
  text "MAGPIO2" at 85.953,40.323 h1.3
  text "SWO" at 31.888,40.311 h1.3 r90
  text "GND" at 99.601,40.248 h1.3
  text "RESET" at 34.428,39.932 h1.3 r90
  text "'.Productname'" at 112.458,39.449 h3
  text "DEBUGGER" at 18.059,35.91 h1.8
  text "P0.12" at 57.761,35.102 h1.52
  text "5V" at 69.198,35.05 h1.52
  text "P0.11" at 69.197,32.588 h1.52
  text "P0.13" at 57.735,32.562 h1.52
  text "DETECT" at 69.197,30.09 h1.52
  text "RESET" at 57.107,30.019 h1.52
  text "TRACE" at 73.5,28.649 h1.8
  text "DEBUG IN" at 89.5,28.649 h1.8
  text "LTE" at 143.05,23.606 h1.8
  text "DEBUGGER" at 1.3,23.549 h1.8
  text "VCOM0" at 31.29,21.149 h1.8
  text "VCOM1" at 41.45,21.149 h1.8
  text "nPM1300" at 15.249,19.469 h1.8
  text "TxD" at 37.298,18.539 h1.27
  text "RxD" at 39.577,18.539 h1.27
  text "SIM / INTERFACE" at 93.685,17.349 h1.8
  text "MFF2 UICC" at 71.326,17.149 h1.8
  text "CTS" at 37.317,16.253 h1.27
  text "RTS" at 39.666,16.253 h1.27
  text "BUTTON 1" at 113.14,16.149 h1.8
  text "BUTTON 2" at 123.79,16.149 h1.8
  text "VDD" at 28.451,10.3 h1.7 r90
  text "VDD" at 30.991,10.3 h1.7 r90
  text "RESET" at 33.532,10.3 h1.7 r90
  text "VDD" at 36.071,10.3 h1.7 r90
  text "5V" at 38.601,10.3 h1.7 r90
  text "GND" at 41.152,10.3 h1.7 r90
  text "GND" at 43.692,10.3 h1.7 r90
  text "N.C." at 46.232,10.3 h1.7 r90
  text "P0.14" at 51.301,10.3 h1.7 r90
  text "P0.15" at 53.841,10.3 h1.7 r90
  text "P0.16" at 56.381,10.3 h1.7 r90
  text "P0.17" at 58.921,10.3 h1.7 r90
  text "P0.18" at 61.461,10.3 h1.7 r90
  text "P0.19" at 64.001,10.3 h1.7 r90
  text "POWER" at 1.85,7.149 h1.8
  text "RESET" at 16.636,7.149 h1.8
  text "BUTTON 3" at 113.14,7.149 h1.8
  text "BUTTON 4" at 123.79,7.149 h1.8
  text "NANO / SIM / CARD" at 78.2,2.949 h1.8 r90
  text "GND" at 68.338,0.695 h1.78
  text "OFF" at 0.75,0.649 h1.8
  text "ON" at 8.5,0.649 h1.8
  text "SIM CURRENT / MEASUREMENT" at 111.8,0.249 h1.8 r90
Bottom Overlay:
  drawing of 389 lines, arcs and shapes, not listed
  text "IOEXP_SCL" at 110.39,62.5 h1.91 r180
  text "P0.31" at 105.589,62.416 h1.91 r180
  text "P0.19" at 120.903,62.417 h1.91 r180
  text "Button 4" at 126.411,62.409 h1.91 r180
  text "nRF91" at 137.274,60.612 h2.03 r180
  text "IOEXP_SDA" at 110.212,59.96 h1.91 r180
  text "P0.30" at 105.321,59.876 h1.91 r180
  text "P0.18" at 120.899,59.877 h1.91 r180
  text "Button 3" at 126.439,59.869 h1.91 r180
  text "IOEXP_IRQ" at 110.418,57.42 h1.91 r180
  text "P0.19" at 105.518,57.336 h1.91 r180
  text "P0.09" at 120.687,57.336 h1.91 r180
  text "Button 2" at 126.457,57.336 h1.91 r180
  text "I2C" at 142.132,56.772 h1.78 r180
  text "GPIO" at 105.258,54.786 h2.03 r180
  text "Function" at 111.271,54.783 h2.03 r180
  text "P0.08" at 120.689,54.796 h1.91 r180
  text "Button 1" at 126.664,54.796 h1.91 r180
  text "BC" at 144.606,54.571 h1.78 r180
  text "COEX1" at 99.601,53.722 h1.27 r180
  text "COEX0" at 87.418,53.693 h1.27 r180
  text "P0.28" at 69.063,53.322 h1.78 r90
  text "P0.26" at 74.143,53.321 h1.78 r90
  text "P0.25" at 76.683,53.304 h1.78 r90
  text "P0.24" at 79.223,53.317 h1.78 r90
  text "P0.23" at 81.763,53.303 h1.78 r90
  text "P0.22" at 84.303,53.293 h1.78 r90
  text "P0.27" at 71.603,53.27 h1.78 r90
  text "P0.31" at 19.283,53.154 h1.65 r90
  text "P0.30" at 21.823,53.154 h1.65 r90
  text "P0.20" at 24.363,53.154 h1.65 r90
  text "GND" at 26.914,53.154 h1.65 r90
  text "P0.13" at 29.443,53.154 h1.65 r90
  text "P0.12" at 31.983,53.154 h1.65 r90
  text "P0.11" at 34.523,53.154 h1.65 r90
  text "P0.10" at 37.063,53.154 h1.65 r90
  text "P0.09" at 39.603,53.155 h1.65 r90
  text "P0.08" at 42.143,53.154 h1.65 r90
  text "P0.07" at 46.207,53.154 h1.65 r90
  text "P0.06" at 48.747,53.154 h1.65 r90
  text "P0.05" at 51.287,53.154 h1.65 r90
  text "P0.04 (D4)" at 53.74,53.158 h1.65 r90
  text "P0.03 (D3)" at 56.28,53.158 h1.65 r90
  text "P0.02 (D2)" at 58.82,53.157 h1.65 r90
  text "P0.01 (D1)" at 61.36,53.157 h1.65 r90
  text "P0.00 (ARDUINO D0)" at 63.9,53.165 h1.65 r90
  text "P0.21" at 86.818,53.171 h1.78 r90
  text "PIN" at 134.884,52.758 h1.78 r180
  text "LED 4" at 127.434,52.258 h1.91 r180
  text "(SCL)" at 20.466,52.25 h1.65 r90
  text "(SDA)" at 23.006,52.25 h1.65 r90
  text "(AREF)" at 25.546,52.25 h1.65 r90
  text "(D13)" at 30.626,52.25 h1.65 r90
  text "(D12)" at 33.166,52.249 h1.65 r90
  text "(D11)" at 35.706,52.249 h1.65 r90
  text "(D10)" at 38.246,52.25 h1.65 r90
  text "(D9)" at 40.786,52.249 h1.65 r90
  text "(D8)" at 43.326,52.249 h1.65 r90
  text "(D7)" at 47.39,52.249 h1.65 r90
  text "(D6)" at 49.93,52.249 h1.65 r90
  text "(D5)" at 52.47,52.249 h1.65 r90
  text "P0.05" at 120.704,52.256 h1.91 r180
  text "EXP" at 138.995,51.466 h1.52 r180
  text "COEX2" at 87.5,51.258 h1.27 r180
  text "P0.29" at 99.601,51.175 h1.27 r180
  text "P0.04" at 120.692,49.716 h1.91 r180
  text "LED 3" at 127.461,49.716 h1.91 r180
  text "SDATA" at 87.5,48.718 h1.27 r180
  text "SCLK" at 99.601,48.642 h1.27 r180
  text "BC" at 134.267,48.194 h1.78 r180
  text "LED 2" at 127.478,47.178 h1.91 r180
  text "P0.01" at 120.926,47.176 h1.91 r180
  text "*" at 105.134,47.117 h2.54 r180
  text "VIO" at 89.07,46.178 h1.27 r180
  text "GND" at 99.601,46.102 h1.27 r180
  text "*" at 113.643,45.212 h2.54 r180
  text "*" at 138.408,44.704 h2.54 r180
  text "LED 1" at 127.685,44.638 h1.91 r180
  text "P0.00" at 120.651,44.636 h1.91 r180
  text "VDD" at 104.964,44.377 h1.45 r180
  text "MAGPIO0" at 85.983,43.638 h1.27 r180
  text "MAGPIO1" at 99.601,43.562 h1.27 r180
  text "VDD / GPIO" at 19.765,43.208 h1.4 r90
  text "SWD / IO" at 27.416,43.013 h1.4 r90
  text "SWD / CLK" at 29.956,43.013 h1.4 r90
  text "VIN / 5V" at 40.094,43.028 h1.4 r90
  text "VDD / nRF" at 42.625,43.013 h1.4 r90
  text "VDD / 5V" at 45.165,43.013 h1.4 r90
  text "VDD" at 21.756,43.007 h1.4 r90
  text "VTG" at 24.296,43.007 h1.4 r90
  text "SWO" at 31.916,43.007 h1.4 r90
  text "RESET" at 34.456,43.006 h1.4 r90
  text "SEL" at 36.996,42.992 h1.4 r90
  text "VIO / REF" at 47.721,43.011 h1.4 r90
  text "ID" at 49.696,43.007 h1.4 r90
  text "LED" at 107.235,42.085 h2.03 r180
  text "Button" at 113.489,42.083 h2.03 r180
  text "GPIO" at 120.625,42.086 h2.03 r180
  text "Function" at 126.511,42.083 h2.03 r180
  text "Circuit" at 134.868,42.086 h2.03 r180
  text "MAGPIO2" at 86.065,41.098 h1.27 r180
  text "GND" at 99.601,41.022 h1.27 r180
  text "CTS2" at 127.906,38.799 h1.91 r180
  text "P0.17" at 120.968,38.794 h1.91 r180
  text "nRF91" at 135.496,36.991 h2.03 r180
  text "RTS2" at 128,36.259 h1.91 r180
  text "P0.16" at 120.913,36.254 h1.91 r180
  text "TxD2" at 127.878,33.716 h1.91 r180
  text "P0.29" at 120.65,33.714 h1.91 r180
  text "RESET" at 88.507,31.216 h1.91 r180
  text "RESET" at 95.517,31.216 h1.91 r180
  text "P0.21" at 102.265,31.215 h1.91 r180
  text "RxD2" at 127.866,31.176 h1.91 r180
  text "P0.28" at 120.741,31.174 h1.91 r180
  text "PIN" at 135.012,31.042 h1.78 r180
  text "nRF91" at 110.211,30.113 h2.03 r180
  text "AREF" at 88.766,28.676 h1.91 r180
  text "P0.20" at 95.711,28.676 h1.91 r180
  text "RESET" at 101.803,28.675 h1.91 r180
  text "P0.15" at 120.917,28.635 h1.91 r180
  text "CTS1" at 128.113,28.64 h1.91 r180
  text "DEF." at 108.319,28.121 h1.52 r180
  text "ALT." at 114.645,28.121 h1.52 r180
  text "BC" at 140.704,27.177 h1.78 r180
  text "D6" at 89.719,26.136 h1.91 r180
  text "P0.06" at 95.668,26.136 h1.91 r180
  text "COEX2" at 101.403,26.135 h1.91 r180
  text "PIN" at 116.561,26.134 h1.78 r180
  text "P0.14" at 120.891,26.095 h1.91 r180
  text "RTS1" at 128.207,26.1 h1.91 r180
  text "BC" at 116.561,23.884 h1.78 r180
  text "D3" at 89.743,23.596 h1.91 r180
  text "P0.03" at 95.693,23.596 h1.91 r180
  text "COEX1" at 101.61,23.595 h1.91 r180
  text "P0.27" at 120.8,23.556 h1.91 r180
  text "TxD1" at 128.085,23.557 h1.91 r180
  text "IF / MCU" at 137.53,22.74 h1.4 r180
  text "ARDUINO" at 109.877,21.22 h1.52 r180
  text "D2" at 89.76,21.056 h1.91 r180
  text "P0.02" at 95.709,21.056 h1.91 r180
  text "COEX0" at 101.342,21.055 h1.91 r180
  text "P0.26" at 120.74,21.016 h1.91 r180
  text "RxD1" at 128.073,21.017 h1.91 r180
  text "Arduino" at 87.608,18.49 h2.03 r180
  text "Default" at 94.932,18.49 h2.03 r180
  text "Alt." at 102.686,18.49 h2.03 r180
  text "Circuit" at 110.337,18.49 h2.03 r180
  text "GPIO" at 120.625,18.465 h2.03 r180
  text "Function" at 126.511,18.462 h2.03 r180
  text "Circuit" at 134.868,18.465 h2.03 r180
  text "P0.14 (A0)" at 51.2,16.522 h1.65 r90
  text "P0.18 (A4)" at 61.36,16.473 h1.65 r90
  text "P0.16 (A2)" at 56.28,16.397 h1.65 r90
  text "P0.19 (A5)" at 63.9,16.404 h1.65 r90
  text "P0.17 (A3)" at 58.82,16.308 h1.65 r90
  text "P0.15 (A1)" at 53.74,16.111 h1.65 r90
  text "P0.20" at 120.731,15.3 h1.91 r180
  text "CS" at 128.754,15.305 h1.91 r180
  text "nRF91" at 137.02,14.923 h2.03 r180
  text "RESET" at 33.518,14.062 h1.65 r90
  text "GND" at 41.138,13.338 h1.65 r90
  text "GND" at 43.678,13.338 h1.65 r90
  text "VDD" at 28.437,13.161 h1.65 r90
  text "VDD" at 30.977,13.161 h1.65 r90
  text "VDD" at 36.057,13.161 h1.65 r90
  text "N.C." at 46.256,13.023 h1.78 r90
  text "P0.13" at 120.92,12.76 h1.91 r180
  text "SCK" at 128.155,12.765 h1.91 r180
  text "J-Link" at 23.03,12.432 h1.45 r90
  text "www.segger.com" at 24.181,12.351 h1.68 r90
  text "PIN" at 134.383,12.27 h1.78 r180
  text "5V" at 38.587,11.987 h1.65 r90
  text "BC" at 142.833,11.205 h1.78 r180
  text "P0.12" at 120.931,10.22 h1.91 r180
  text "MISO" at 127.708,10.225 h1.91 r180
  text "TM" at 22.609,8.963 h0.94 r90
  text "S" at 21.171,8.749 h1.35 r90
  text "E" at 21.171,7.86 h1.35 r90
  text "EXT MEMORY" at 136.378,7.872 h1.52 r180
  text "P0.11" at 121.042,7.68 h1.91 r180
  text "MOSI" at 127.737,7.685 h1.91 r180
  text "Technology" at 23.03,7.68 h1.45 r90
  text "G" at 21.171,7.076 h1.35 r90
  text "G" at 21.171,6.085 h1.35 r90
  text "GPIO" at 120.625,5.13 h2.03 r180
  text "Function" at 126.511,5.127 h2.03 r180
  text "Circuit" at 138.424,5.13 h2.03 r180
  text "E" at 21.171,5.061 h1.35 r90
  text "R" at 21.171,4.226 h1.35 r90
Board Outline:
  lines w0.2: 148.5,13.999 148.5,0.999 cw(c147.5,0.999) 147.5,-0.001 91.9,-0.001 cw(c91.9,1.179) 91.066,0.345 ccw(c90.231,-0.49) 90.231,0.69 81.969,0.69 ccw(c81.969,-0.49) 81.134,0.345 cw(c80.3,1.179) 80.3,-0.001 1,-0.001 cw(c1,0.999) 0,0.999 0,24.12 cw(c2.716,24.12) 0.796,26.041 0.962,26.207 ; 148.5,23.099 148.5,40.399 ; 148.5,49.499 148.5,62.499 ccw(c147.5,62.499) 147.5,63.499 1,63.499 ccw(c1,62.499) 0,62.499 0,39.38 ccw(c2.716,39.38) 0.796,37.459 0.962,37.293 cw(c-0.876,35.75) 1.524,35.75 ; 0.962,26.207 ccw(c-0.876,27.75) 1.524,27.75 ; 0.962,26.207 ccw(c-0.876,27.75) 1.524,27.75 ; 1.524,27.75 1.524,35.75 ; 1.524,27.75 1.524,35.75
Top Assembly:
  drawing of 40 lines, arcs and shapes, not listed
Bottom Assembly:
  lines w0.1: 67.94,41.699 67.94,44.799 69.24,44.799 69.24,41.699 67.94,41.699 ; 70.48,41.699 70.48,44.799 71.78,44.799 71.78,41.699 70.48,41.699 ; 71.145,7.929 72.435,7.929 72.435,9.229 71.145,9.229 71.145,7.929 ; 71.145,15.299 71.145,16.599 72.435,16.599 72.435,15.299 71.145,15.299 ; 71.25,1.929 72.75,1.929 72.75,3.629 71.25,3.629 71.25,1.929 ; 71.74,16.799 71.74,18.299 73.34,18.299 73.34,16.799 71.74,16.799 ; 73.02,41.699 73.02,44.799 74.32,44.799 74.32,41.699 73.02,41.699 ; 73.55,16.629 74.35,16.629 74.35,18.309 73.55,18.309 73.55,16.629 ; 74.65,16.629 74.65,18.309 75.45,18.309 75.45,16.629 74.65,16.629 ; 75.56,41.699 75.56,44.799 76.86,44.799 76.86,41.699 75.56,41.699 ; 75.75,16.629 75.75,18.309 76.55,18.309 76.55,16.629 75.75,16.629 ; 76.85,16.629 76.85,18.309 77.65,18.309 77.65,16.629 76.85,16.629 ; 77.95,16.629 78.75,16.629 78.75,18.309 77.95,18.309 77.95,16.629 ; 78.1,41.699 79.4,41.699 79.4,44.799 78.1,44.799 78.1,41.699 ; 79.05,16.629 79.85,16.629 79.85,18.309 79.05,18.309 79.05,16.629 ; 80.15,16.629 80.15,18.309 80.95,18.309 80.95,16.629 80.15,16.629 ; 80.7,41.699 80.7,44.799 81.9,44.799 81.9,41.699 80.7,41.699 ; 81.25,16.629 82.05,16.629 82.05,18.309 81.25,18.309 81.25,16.629 ; 84.4,16.799 86,16.799 86,18.299 84.4,18.299 84.4,16.799 ; 84.75,1.929 84.75,3.629 86.25,3.629 86.25,1.929 84.75,1.929 ; 91.122,40.005 91.122,41.275 94.932,41.275 94.932,40.005 91.122,40.005 ; 91.122,42.545 94.932,42.545 94.932,43.815 91.122,43.815 91.122,42.545 ; 91.122,45.085 91.122,46.355 94.932,46.355 94.932,45.085 91.122,45.085 ; 91.122,47.625 91.122,48.895 94.932,48.895 94.932,47.625 91.122,47.625 ; 91.122,50.165 94.932,50.165 94.932,51.435 91.122,51.435 91.122,50.165 ; 91.122,52.705 91.122,53.975 94.932,53.975 94.932,52.705 91.122,52.705 ; 95.567,40.005 99.377,40.005 99.377,41.275 95.567,41.275 95.567,40.005 ; 95.567,42.545 95.567,43.815 99.377,43.815 99.377,42.545 95.567,42.545 ; 95.567,45.085 99.377,45.085 99.377,46.355 95.567,46.355 95.567,45.085 ; 95.567,47.625 99.377,47.625 99.377,48.895 95.567,48.895 95.567,47.625 ; 95.567,50.165 95.567,51.435 99.377,51.435 99.377,50.165 95.567,50.165 ; 95.567,52.705 99.377,52.705 99.377,53.975 95.567,53.975 95.567,52.705
Top Impedance Info:
  lines w0.1: 12.1,31.949 12.3,31.949 12.35,31.999 12.35,32.015 12.409,32.074 21.9,32.074 cw(c21.9,31.774) 22.2,31.774 22.2,31.299 ; 12.1,32.449 12.3,32.449 12.35,32.399 12.35,32.383 12.409,32.324 21.9,32.324 cw(c21.9,31.774) 22.45,31.774 22.45,31.299 ; 22.119,31.259 22.12,31.258 22.125,31.258 22.159,31.258 22.2,31.299 ; 22.525,31.258 22.491,31.258 22.45,31.299 ; 22.2,31.299 22.2,31.299 ; 22.45,31.299 22.45,31.299
  lines w1: 125.85,19.552 ccw(c126.703,19.552) 126.1,18.949 ccw(c127.066,19.915) 127.066,18.549 140.05,18.549 ; 130.05,21.249 133.68,21.249 ccw(c133.68,22.849) 135.28,22.849 135.28,28.849 ; 135.28,30.089 135.28,30.879 135.28,42.409 cw(c137.82,42.409) 137.82,44.949 139.85,44.949 140.1,44.949
  text "90 ohm diff impedance" at 9.69,27.773 h2
  text "50 ohm impedance, Coplanar line" at 130.85,24.075 h2 r90

## Dimensions
154,-0.001 to 90.17,55.88 on Dimensions
154,-0.001 to 66.04,40.64 on Dimensions
154,-0.001 to 66.04,12.7 on Dimensions
154,-0.001 to 96.52,7.62 on Dimensions
154,-0.001 to 147.5,63.499 on Dimensions
0,0.999 to 96.52,7.62 on Dimensions
0,0.999 to 66.04,12.7 on Dimensions
0,0.999 to 15.24,55.88 on Dimensions
0,0.999 to 13.97,7.62 on Dimensions
0,0.999 to 148.5,0.999 on Dimensions
0,0.999 to 144.829,63.5 on Dimensions
0,0.999 to 90.17,55.88 on Dimensions
147.5,0.999 to 160.7,-3.567 on Dimensions

## Text inside footprints (layer, text, board x,y; h text height)
J6: Top Component Outline "Board Edge" at 2.185,33.724 h0.38 r270
LOGO2: Bottom Overlay "S" at 21.171,8.75 h1.35 r90; Bottom Overlay "E" at 21.171,7.861 h1.35 r90; Bottom Overlay "G" at 21.171,7.077 h1.35 r90; Bottom Overlay "G" at 21.171,6.086 h1.35 r90; Bottom Overlay "E" at 21.171,5.062 h1.35 r90; Bottom Overlay "R" at 21.171,4.227 h1.35 r90; Bottom Overlay "TM" at 22.609,8.964 h0.94 r90; Bottom Overlay "www.segger.com" at 24.181,12.352 h1.68 r90; Bottom Overlay "J-Link" at 23.03,12.433 h1.45 r90; Bottom Overlay "Technology" at 23.03,7.681 h1.45 r90
P18: Top Overlay "1" at 91.3,20.549 h1.02
P19: Top Overlay "1" at 7.468,55.93 h1.5
P25: Top Overlay "1" at 72.125,20.549 h1.02
P28: Top Overlay "1" at 95.364,9.371 h1.5